# Altium PCB PROC091F.PcbDoc (part 2 of 8)
Units mil, origin at the board's own origin, x right, y up, seen from the top; angles counter-clockwise.
Board outline 3590.95 x 906.17 mil, 8 copper layers (Top Layer, GND1, Sig1, PWR1, PWR2, Sig2, GND2, Bottom Layer), stack 63.146 mil thick; 420 components, 316 nets, 1432 pads, 774 vias.
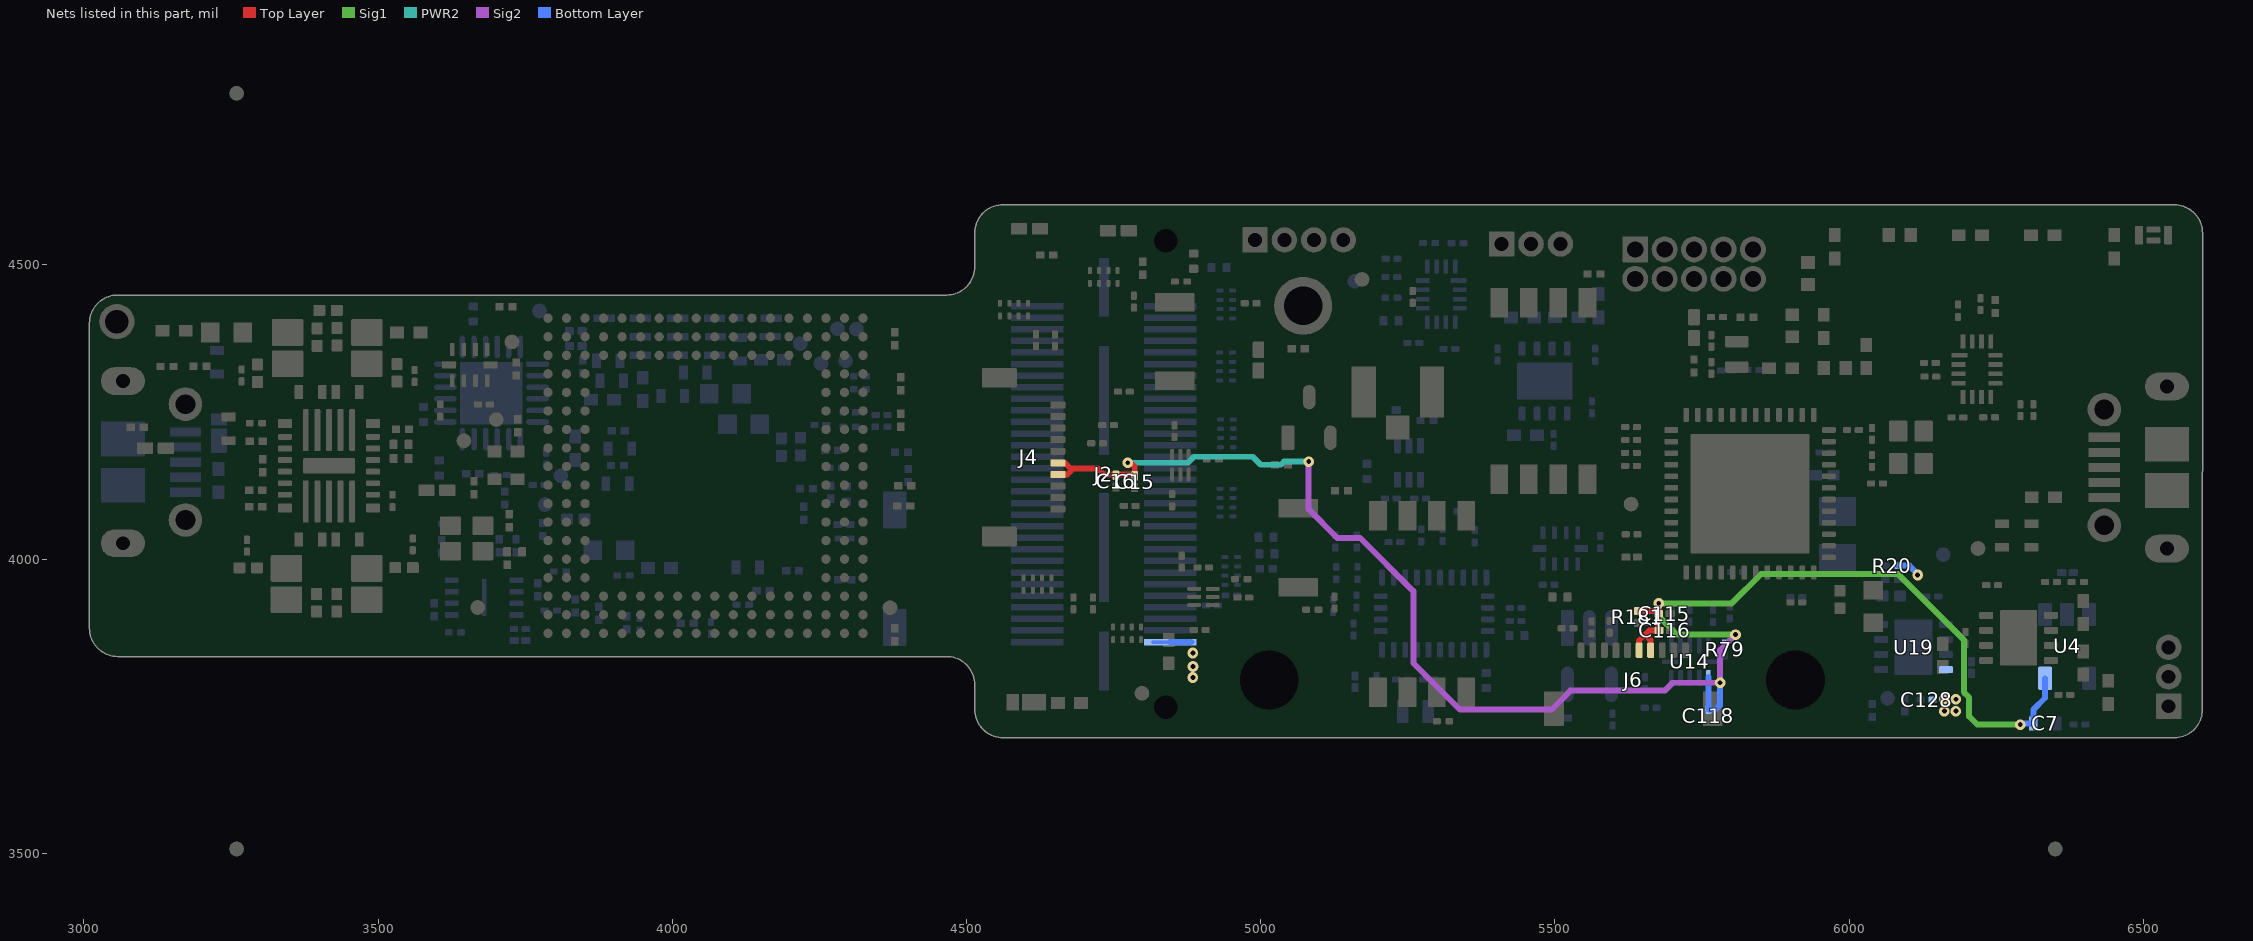
[diagram p8: the nets of this part, all layers, seen from the top]

## Components (designator, comment, footprint, x,y, rotation, side; value= is the part's Value field where it differs from the comment) (continued)
RA9 "EXB-18VR000X" FP-EXB-18VR000X_0502-MFG 4949.85,3979.76 r90 bottom locked
S1 "218-4LPST" SW_218-4LPST 5480.37,4285.46 r90 top
S2 "218-4LPST" SW_218-4LPST 5274.37,3923.46 r90 top
S3 "CHS-01TA" FP-CHS-01TA_SMT_SW_5MM4_2MM5-MFG 4378.13,3983.7 r270 bottom
SW2 "B3U-1000P" SW_B3U-1000P 4854.16,4369.94 r270 top
SW3 "B3U-1000P" SW_B3U-1000P 5063.87,4019.39 r90 top
TP2 "TESTPOINT" TP_25MIL-SMT 3810.59,4141.77 r90 bottom
TP3 "TESTPOINT" TP_25MIL-SMT 3784,4092.76 r90 bottom
TP4 "TESTPOINT" TP_25MIL-SMT 6159.89,4007.65 r180 bottom
TP5 "TESTPOINT" TP_25MIL-SMT 3669.3,3917.72 r90 top
TP6 "TESTPOINT" TP_25MIL-SMT 4313,4390.94 r0 bottom
TP7 "TESTPOINT" TP_25MIL-SMT 4280.69,4391.59 r270 bottom
TP8 "TESTPOINT" TP_25MIL-SMT 4252.7,4332.6 r90 bottom
TP9 "TESTPOINT" TP_25MIL-SMT 4217.3,4366.19 r90 bottom
TP10 "TESTPOINT" TP_25MIL-SMT 6065.37,3763.46 r270 bottom
TP11 "TESTPOINT" TP_25MIL-SMT 4370,3917.37 r90 top
TP12 "TESTPOINT" TP_VIA_060RND040 3056.09,4403.54 r90 top
TP13 "TESTPOINT" TP_25MIL-SMT 4798.18,3771.83 r270 top
TP14 "TESTPOINT" TP_25MIL-SMT 4294.6,4337.1 r180 bottom
TP15 "TESTPOINT" TP_25MIL-SMT 6219,4018 r90 top
TP16 "TESTPOINT" TP_25MIL-SMT 5629.37,4093.46 r180 top
TP17 "TESTPOINT" TP_25MIL-SMT 3701,4237 r270 top
TP18 "TESTPOINT" TP_25MIL-SMT 3727.56,4369.01 r90 top
TP19 "TESTPOINT" TP_25MIL-SMT 3645.95,4200.94 r90 top
TP20 "4953" FP-4953_HDR1-MFG 5072.16,4430.47 r180 bottom locked
TP26 "TESTPOINT" TP_25MIL-SMT 3774.42,4421.63 r0 bottom
TP27 "TESTPOINT" TP_25MIL-SMT 5172.19,4475.26 r270 top
TP46 "TESTPOINT" TP_25MIL-SMT 5159.8,4472.11 r180 bottom locked
U1 "LP87524JRNFRQ1" RNF0026C 3416.61,4158.52 r180 top
U2 "XI6843ARQGALP" ALP0180A 4056.48,4141.61 r90 top
U3 "CP2105-F01-GMR" FP-CP2105-F01-GMR_QFN24-EP-IPC_A 3692.64,4282.2 r180 bottom
U4 "TPS79330DBVR" DBV0005A_N 6370.37,3851.63 r270 bottom
U5 "TMP112AQDRLRQ1" DRL0006A 5251.98,4163.77 r270 bottom locked
U6 "CAT24C08TDI-GT3" FP-CAT24C08TDI-GT3_TSOT-23-5-IPC_A 5558.54,3835.01 r270 bottom
U7 "BNO085" FP-BNO085_LGA28-MFG 5294.88,3907.22 r270 bottom
U8 "CC2642R1FRGZR" RGZ0048A 5831.57,4111.11 r270 top
U9 "MX25R1635FZUIH0" USON-8L 3680.29,3934.68 r0 bottom
U10 "TCA6408ARSVR" RSV0016A 5306.8,4449.73 r180 bottom locked
U11 "SN74LVC1G3157DSFR" DSF0006A 4902.7,3935.72 r0 top locked
U12 "TCAN1042HGVDRBRQ1" DRB0008F#1 5482.58,4302.51 r90 bottom
U13 "TS3A5018RSVR" RSV0016A 6217.13,4322.76 r0 top
U14 "TXB0104QRUTRQ1" RUT0012A 5729.23,3825.36 r90 bottom
U15 "TS5A23157RSER" RSE0010A 5509.21,4018.34 r270 bottom
U16 "SN74LVC1G11DSFR" DSF0006A-MFG 4863.37,4159.46 r90 top
U17 "TCAN1042HGVDRBRQ1" DRB0008F#2 6287.97,3866 r0 top
U18 "TS5A23157RSER" RSE0010A 3655.79,4329.59 r270 top
U19 "TPS2115ADRBR" DRB0008B 6109.37,3850.46 r0 bottom
Y1 "CX2016DB40000D0FLJCC" FP-CX2016DB40000D0FLJCC_SMT_2MM0_1MM6-MFG 3650.54,4035.03 r0 top
Y2 "CX2016DB48000C0WPLA2" FP-CX2016DB48000C0WPLA2_SMD4-MFG 6104.9,4189.85 r270 top
Y3 "ABS05W-32.768KHZ-D-2-T" FP-ABS05W-32.768KHZ-D-2-T_XTAL_SMT_1MM6_1MM0-MFG 5808.9,4347.93 r270 top
Y4 "ABS05W-32.768KHZ-D-2-T" FP-ABS05W-32.768KHZ-D-2-T_XTAL_SMT_1MM6_1MM0-MFG 5262.82,3740.88 r0 bottom locked
ZZ1 "This Assembly Note is for PCB labels only" AssemblyNoteLabel 2349.62,2814.36 r0 top
ZZ2 "These assemblies are ESD sensitive, ESD precautions shall be observed." AssemblyNote 2346.49,2738.89 r0 top
ZZ3 "These assemblies must be clean and free from flux and all contaminants. Use of no clean flux is not acceptable." AssemblyNote 2346.43,2653.5 r0 top
ZZ4 "These assemblies must comply with workmanship standards IPC-A-610 Class 2, unless otherwise specified." AssemblyNote 2343.34,2567.2 r0 top
ZZ5.1 "Cut the thermal pad(Part Number#GPVOUS-0.125-AC-0816) for the shape and size of the inner surface of the heatsink(Part Number#MCH054) and paste it on the inner surface of the heatsink;" AssemblyNote 2340.76,2492.7 r0 top
ZZ5.2 "Bring the heatsink onto the PCB bottom side (Opposite side of AOP device). Match the teeth in the heatsink with break-away area in the PCB and press the heatsink onto the PCB slightly so as thermal pad is spread all over the area" AssemblyNote 2343.41,2409 r0 top

## Footprints (in the part's own frame and the unit in brackets; to place one, negate y for a bottom-side part, rotate by r counter-clockwise, add the part's x,y. Pads: shape width x height; smd on the part's side, far side on the other; paste and mask are expansions set on the pad)
0201_033L [mm] "0201"
  rect 0.36x0.32 smd mask+0.048: 1(-0.28,0) 2(0.28,0)
  body extent -0.31,-0.16 0.31,0.16, height 0.33
0201L [mm] "Data from Kemet datasheet CC101_COM dated 7/28/11"
  rect 0.36x0.32 smd mask+0.048: 1(-0.28,0) 2(0.28,0)
  body extent -0.31,-0.16 0.31,0.16, height 0.26
0402_070 [mil] "SMD, 2-Leads, Body 1.2x0.7mm, Height 0.7mm"
  rect 15x24 smd: 1(-20,0) 2(20,0)
  body extent -24,-14 24,14, height 28
0402L [mm] "0402 from SM-752 data"
  rect 0.6x0.5 smd: 1(-0.5,0) 2(0.5,0)
  body extent -0.55,-0.3 0.55,0.3, height 0.6
0603L [mm] "0603 from SM-752 data"
  rect 0.8x0.85 smd: 1(-0.7,0) 2(0.7,0)
  silkscreen extent -0.07,-0.33 0.07,0.33, body extent -0.87,-0.47 0.87,0.47, height 1
0805_HV [mil] "0805 with 30mil clearance between pads"
  rect 50x63 smd: 1(-40,0) 2(40,0)
  silkscreen extent -74,-40 74,40, body extent -43,-29 43,29, height 57
ALP0180A [mm] "BGA-180"
  round 0.4 smd: A1(-6.8,6.8) A2(-6,6.8) A3(-5.2,6.8) A4(-4.4,6.8) A5(-3.6,6.8) A6(-2.8,6.8) A7(-2,6.8) A8(-1.2,6.8) A9(-0.4,6.8) A10(0.4,6.8) A11(1.2,6.8) A12(2,6.8) A13(2.8,6.8) A14(3.6,6.8) A15(4.4,6.8) A16(5.2,6.8) A17(6,6.8) A18(6.8,6.8) B1(-6.8,6) B2(-6,6) B3(-5.2,6) B4(-4.4,6) B5(-3.6,6) B6(-2.8,6) B7(-2,6) B8(-1.2,6) B9(-0.4,6) B10(0.4,6) B11(1.2,6) B12(2,6) B13(2.8,6) B14(3.6,6) B15(4.4,6) B16(5.2,6) B17(6,6) B18(6.8,6) C1(-6.8,5.2) C2(-6,5.2) C3(-5.2,5.2) C4(-4.4,5.2) C5(-3.6,5.2) C6(-2.8,5.2) C7(-2,5.2) C8(-1.2,5.2) C9(-0.4,5.2) C10(0.4,5.2) C11(1.2,5.2) C12(2,5.2) C13(2.8,5.2) C14(3.6,5.2) C15(4.4,5.2) C16(5.2,5.2) C17(6,5.2) C18(6.8,5.2) D1(-6.8,4.4) D2(-6,4.4) D3(-5.2,4.4) D16(5.2,4.4) D17(6,4.4) D18(6.8,4.4) E1(-6.8,3.6) E2(-6,3.6) E3(-5.2,3.6) E16(5.2,3.6) E17(6,3.6) E18(6.8,3.6) F1(-6.8,2.8) F2(-6,2.8) F3(-5.2,2.8) F16(5.2,2.8) F17(6,2.8) F18(6.8,2.8) G1(-6.8,2) G2(-6,2) G3(-5.2,2) G16(5.2,2) G17(6,2) G18(6.8,2) H1(-6.8,1.2) H2(-6,1.2) H3(-5.2,1.2) H16(5.2,1.2) H17(6,1.2) H18(6.8,1.2) J1(-6.8,0.4) J2(-6,0.4) J3(-5.2,0.4) J16(5.2,0.4) J17(6,0.4) J18(6.8,0.4) K1(-6.8,-0.4) K2(-6,-0.4) K3(-5.2,-0.4) K16(5.2,-0.4) K17(6,-0.4) K18(6.8,-0.4) L1(-6.8,-1.2) L2(-6,-1.2) L3(-5.2,-1.2) L16(5.2,-1.2) L17(6,-1.2) L18(6.8,-1.2) M1(-6.8,-2) M2(-6,-2) M3(-5.2,-2) M16(5.2,-2) M17(6,-2) M18(6.8,-2) N1(-6.8,-2.8) N2(-6,-2.8) N3(-5.2,-2.8) N16(5.2,-2.8) N17(6,-2.8) N18(6.8,-2.8) P1(-6.8,-3.6) P2(-6,-3.6) P3(-5.2,-3.6) P16(5.2,-3.6) P17(6,-3.6) P18(6.8,-3.6) R1(-6.8,-4.4) R2(-6,-4.4) R3(-5.2,-4.4) R16(5.2,-4.4) R17(6,-4.4) R18(6.8,-4.4) T1(-6.8,-5.2) T2(-6,-5.2) T3(-5.2,-5.2) T4(-4.4,-5.2) T5(-3.6,-5.2) T6(-2.8,-5.2) T7(-2,-5.2) T8(-1.2,-5.2) T9(-0.4,-5.2) T10(0.4,-5.2) T11(1.2,-5.2) T12(2,-5.2) T13(2.8,-5.2) T14(3.6,-5.2) T15(4.4,-5.2) T16(5.2,-5.2) T17(6,-5.2) T18(6.8,-5.2) U1(-6.8,-6) U2(-6,-6) U3(-5.2,-6) U4(-4.4,-6) U5(-3.6,-6) U6(-2.8,-6) U7(-2,-6) U8(-1.2,-6) U9(-0.4,-6) U10(0.4,-6) U11(1.2,-6) U12(2,-6) U13(2.8,-6) U14(3.6,-6) U15(4.4,-6) U16(5.2,-6) U17(6,-6) U18(6.8,-6) V1(-6.8,-6.8) V2(-6,-6.8) V3(-5.2,-6.8) V4(-4.4,-6.8) V5(-3.6,-6.8) V6(-2.8,-6.8) V7(-2,-6.8) V8(-1.2,-6.8) V9(-0.4,-6.8) V10(0.4,-6.8) V11(1.2,-6.8) V12(2,-6.8) V13(2.8,-6.8) V14(3.6,-6.8) V15(4.4,-6.8) V16(5.2,-6.8) V17(6,-6.8) V18(6.8,-6.8)
  silkscreen extent -7.5,-7.5 7.5,7.5, body extent -7.5,-7.5 7.5,7.5, height 0.86
APHHS1005_Green [mm] "SMD, 2-Leads, Body 1x0.5mm"
  rrect20% 0.7x0.5 smd: 1(-0.45,0) 2(0.45,0)
  silkscreen extent -0.8,-0.65 1.2,0.65, body extent -0.5,-0.25 0.5,0.25, height 0.5
AssemblyNote [mil] "Assembly Note"
AssemblyNoteLabel [mil] "Assembly Note for PCB Labels"
BRAKE_WAY_HOLES1X2 [mil]
  round 27 hole 32 unplated mask+5.5: ""(-50,30.26) ""(0,30.26) ""(50,30.26)
CONN_105017-0001 [mm] "Molex Micro USB-B"
  rect 0.4x1.35 smd: 1(-1.3,1.35) 2(-0.65,1.35) 3(0,1.35) 4(0.65,1.35) 5(1.3,1.35)
  oval 1.2x1.9 hole 0.6 slot 1.3 at 90 deg: 6(-3.5,-1.35) 9(3.5,-1.35)
  rect 1.5x1.9 smd: 7(-1,-1.35) 8(1,-1.35)
  round 1.45 hole 0.85: 10(2.5,1.35) 11(-2.5,1.35)
  Top Layer region: -3.5,-0.4 -2.3,-0.4 -2.3,-2.3 -3.5,-2.3
  Top Layer region: 3.5,-2.3 2.3,-2.3 2.3,-0.4 3.5,-0.4
  silkscreen extent -4.1,-0.2 4.1,1.4, body extent -4.1,-3.93 4.1,1.5, height 2.72
CONN_UFL-R-SMT-1 [mm] "Hirose recommended land pattern http://www.hirose.co.jp/cataloge_hp/e32119372.pdf 2009.2"
  rect 1.05x1 smd paste-0.1 mask-0.1: 1(-1.525,0)
  rect 2x0.9 on Top Paste: 2(0,1.5) 3(0,-1.5)
  rect 2x0.9 on Top Solder: 2(0,1.5) 3(0,-1.5)
  rect 2.2x1.05 smd paste-2 mask-2: 2(0,1.475) 3(0,-1.475)
  Top Layer keep-out region: -0.8,-0.702 1.1,-0.702 1.1,0.698 -0.8,0.698
  silkscreen extent -1.7,-1.7 1.7,1.7, body extent -1.55,-1.5 1.55,1.5, height 1.27
DBV0005A_N [mm] "SOT23, 5-Leads, Body 2.9x1.6mm, Pitch 0.95mm, Lead Span 2.8mm, IPC Medium Density"
  rrect17% 1x0.6 smd: 1(-1.375,0.95) 2(-1.375,0) 3(-1.375,-0.95) 4(1.375,-0.95) 5(1.375,0.95)
  silkscreen extent -0.25,-1.55 0.25,1.55, body extent -1.42,-1.46 1.42,1.46, height 1.09
DRB0008B [mm] "SON, 8-Leads, Body 3x3mm, Pitch 0.65mm, Thermal Pad 2.4x1.65mm, TI Recommended"
  rrect33% 0.6x0.3 smd: 1(-1.4,0.975) 2(-1.4,0.325) 3(-1.4,-0.325) 4(-1.4,-0.975) 5(1.4,-0.975) 6(1.4,-0.325) 7(1.4,0.325) 8(1.4,0.975)
  rrect9% 1.47x1.06 on Bottom Paste: 9(0,-0.63) 9(0,0.63)
  rrect6% 1.65x2.4 smd paste-1.2: 9(0,0)
  silkscreen extent -1.73,-1.73 1.73,1.73, body extent -1.5,-1.5 1.5,1.5, height 0.96
DRB0008F#1 [mm] "SON, 8-Leads, Body 3x3mm, Pitch 0.65mm, Thermal Pad 2.4x1.6mm, TI Recommended"
  rrect33% 0.6x0.3 smd: 1(-1.4,0.975) 2(-1.4,0.325) 3(-1.4,-0.325) 4(-1.4,-0.975) 5(1.4,-0.975) 6(1.4,-0.325) 7(1.4,0.325) 8(1.4,0.975)
  rrect9% 1.47x1.07 on Bottom Paste: 9(0,-0.635) 9(0,0.635)
  rrect6% 1.6x2.4 smd paste-1.2: 9(0,0)
  silkscreen extent -1.73,-1.73 1.73,1.73, body extent -1.5,-1.5 1.5,1.5, height 0.77
DRB0008F#2 [mm] "SON, 8-Leads, Body 3x3mm, Pitch 0.65mm, Thermal Pad 2.4x1.6mm, TI Recommended"
  rrect33% 0.6x0.3 smd: 1(-1.4,0.975) 2(-1.4,0.325) 3(-1.4,-0.325) 4(-1.4,-0.975) 5(1.4,-0.975) 6(1.4,-0.325) 7(1.4,0.325) 8(1.4,0.975)
  rrect9% 1.47x1.07 on Top Paste: 9(0,-0.635) 9(0,0.635)
  rrect6% 1.6x2.4 smd paste-1.2: 9(0,0)
  silkscreen extent -1.73,-1.73 1.73,1.73, body extent -1.5,-1.5 1.5,1.5, height 0.77
DRL0006A [mm] "SOTFL, 6-Flat Leads, Body 1.2x1.6x0.6mm, Pitch 0.5mm, TI recommended"
  rrect33% 0.67x0.3 smd: 1(-0.74,0.5) 2(-0.74,0) 3(-0.74,-0.5) 4(0.74,-0.5) 5(0.74,0) 6(0.74,0.5)
  silkscreen extent -0.9,-0.95 0.5,0.95, body extent -0.8,-0.8 0.8,0.8, height 0.61
DSF0006A [mm] "TI recommended land pattern"
  rrect59% 0.6x0.17 smd mask+0.045: 1(-0.4,0.35) 2(-0.4,0) 3(-0.4,-0.35) 4(0.4,-0.35) 5(0.4,0) 6(0.4,0.35)
  silkscreen extent -0.6,-0.63 0.6,0.63, body extent -0.5,-0.5 0.5,0.5, height 0.48
DSF0006A-MFG [mm]
  rrect59% 0.6x0.17 smd paste+0 mask+0: 1(-0.4,0.35) 2(-0.4,0) 3(-0.4,-0.35) 4(0.4,-0.35) 5(0.4,0) 6(0.4,0.35)
  silkscreen extent -1.14,-0.85 0.53,1.02, body extent -0.8,-0.63 0.8,0.63, height 0.25
DSN2_0603 [mm] "SMD, 2-Leads, Body 1.6x0.8mm"
  rect 0.52x0.7 smd: 1(-0.64,0)
  rect 1.05x0.7 smd: 2(0.275,0)
  silkscreen extent -1.4,-0.75 0.8,0.65, body extent -0.8,-0.4 0.8,0.4, height 0.31
FIDUCIAL6.4-20 [mil]
  round 25 smd mask+26.87: 1(0,0)
FP-250R05L120JV4T_0201-IPC_C [mm]
  rrect38% 0.363x0.263 smd paste+0 mask+0: 1(-0.25,0) 2(0.25,0)
  body extent -0.53,-0.27 0.53,0.26, height 0.25
FP-4953_HDR1-MFG [mm]
  round 2.5 hole 1.65 paste-1000 mask+0: 1(0,0)
  body extent -1.24,-0.25 1.24,0.25, height 9.16
FP-51441-1093_CONN_SMD_FFC-0 [mm]
  rrect33% 0.3x0.65 smd paste+0 mask+0: 1(-2.25,1.775) 2(-1.75,1.775) 3(-1.25,1.775) 4(-0.75,1.775) 5(-0.25,1.775) 6(0.25,1.775) 7(0.75,1.775) 8(1.25,1.775) 9(1.75,1.775) 10(2.25,1.775)
  rrect12% 0.85x1.5 smd paste+0 mask+0: 11(-3.425,-0.75) 12(3.425,-0.75)
  body extent -3.95,-1.9 3.95,2.2, height 0.25
FP-ABS05W-32.768KHZ-D-2-T_XTAL_SMT_1MM6_1MM0-MFG [mm]
  rrect20% 0.5x1 smd paste+0 mask+0: 1(-0.55,0) 2(0.55,0)
  body extent -0.95,-0.65 0.95,0.65, height 0.25
FP-AC0201FR-0720RL_0201-IPC_C [mil]
  rrect38% 13.94x10.34 smd paste+0 mask+0: 1(-10.01,0) 2(10.01,0)
  body extent -12,-6 12,6, height 10
FP-ANT016008LCS2442MA2_SMT_ANT-0 [mm]
  rrect29% 0.35x0.8 smd paste+0 mask+0.038: 1(-0.625,0) 4(0.625,0)
  rrect38% 0.6x0.26 smd paste+0 mask+0.038: 2-3(0,-0.235) 5-6(0,0.235)
  body extent -0.95,-0.55 0.95,0.55, height 0.25
FP-BNO085_LGA28-MFG [mm]
  rrect40% 0.675x0.25 smd paste+0 mask+0: 1(1.562,2.25) 6(-1.562,2.25) 7(-1.562,1.75) 8(-1.562,1.25) 9(-1.562,0.75) 10(-1.562,0.25) 11(-1.562,-0.25) 12(-1.562,-0.75) 13(-1.562,-1.25) 14(-1.562,-1.75) 15(-1.562,-2.25) 20(1.562,-2.25) 21(1.562,-1.75) 22(1.562,-1.25) 23(1.562,-0.75) 24(1.562,-0.25) 25(1.562,0.25) 26(1.562,0.75) 27(1.562,1.25) 28(1.562,1.75)
  rrect40% 0.25x0.575 smd paste+0 mask+0: 2(0.75,2.312) 3(0.25,2.312) 4(-0.25,2.312) 5(-0.75,2.312) 16(-0.75,-2.312) 17(-0.25,-2.312) 18(0.25,-2.312) 19(0.75,-2.312)
  body extent -1.9,-2.6 1.9,2.6, height 1.18
FP-BSS123-7-F_SOT23-IPC_C [mm]
  rrect18% 1.059x0.547 smd paste+0 mask+0: 1(-0.877,0.915)
  rrect100% 1.059x0.547 smd paste+0 mask+0: 2(-0.877,-0.915) 3(0.877,0)
  body extent -1.51,-1.55 1.51,1.55, height 0.25
FP-CAT24C08TDI-GT3_TSOT-23-5-IPC_A [mm]
  rrect18% 1.54x0.566 smd paste+0 mask+0: 1(-1.216,0.95)
  rrect100% 1.54x0.566 smd paste+0 mask+0: 2(-1.216,0) 3(-1.216,-0.95) 4(1.216,-0.95) 5(1.216,0.95)
  body extent -1.4,-1.45 1.4,1.45, height 1
FP-CHS-01TA_SMT_SW_5MM4_2MM5-MFG [mm]
  rrect10% 1.6x1 smd paste+0 mask+0: 1(-2.54,0) 2(2.54,0)
  body extent -2.8,-1.25 2.8,1.25, height 2.5
FP-CL03A103KA3NNNC_0201-IPC_C [mil]
  rrect38% 13.94x10.34 smd paste+0 mask+0: 1(-10.01,0) 2(10.01,0)
  body extent -12,-6 12,6, height 15
FP-CL03A105MO3NRNH_0201-IPC_C [mil]
  rrect33% 15.83x11.94 smd paste+0 mask+0: 1(-9.87,0) 2(9.87,0)
  body extent -12,-6 12,6, height 15
FP-CL05A226MQ5N6J8_0402-IPC_C [mil]
  rrect21% 20.29x18.6 smd paste+0 mask+0: 1(-14.9,0) 2(14.9,0)
  body extent -29,-15 29,15, height 10
FP-CP2105-F01-GMR_QFN24-EP-IPC_A [mm]
  rrect42% 0.979x0.239 smd paste+0 mask+0: 1(-1.99,1.25)
  rrect100% 0.979x0.239 smd paste+0 mask+0: 2(-1.99,0.75) 3(-1.99,0.25) 4(-1.99,-0.25) 5(-1.99,-0.75) 6(-1.99,-1.25) 13(1.99,-1.25) 14(1.99,-0.75) 15(1.99,-0.25) 16(1.99,0.25) 17(1.99,0.75) 18(1.99,1.25)
  rrect100% 0.239x0.979 smd paste+0 mask+0: 7(-1.25,-1.99) 8(-0.75,-1.99) 9(-0.25,-1.99) 10(0.25,-1.99) 11(0.75,-1.99) 12(1.25,-1.99) 19(1.25,1.99) 20(0.75,1.99) 21(0.25,1.99) 22(-0.25,1.99) 23(-0.75,1.99) 24(-1.25,1.99)
  rrect4% 2.7x2.7 smd paste-1000 mask+0: 25(0,0)
  body extent -2,-2 2,2, height 0.8
FP-CRCW0402200RFKEDHP_0402-IPC_C [mil]
  rrect21% 20.29x18.6 smd paste+0 mask+0: 1(-14.9,0) 2(14.9,0)
  body extent -20,-10 20,10, height 16
FP-CX2016DB40000D0FLJCC_SMT_2MM0_1MM6-MFG [mm]
  rrect13% 0.9x0.8 smd paste+0 mask+0: 1(-0.7,-0.55) 2(0.7,-0.55) 3(0.7,0.55) 4(-0.7,0.55)
  body extent -1.25,-1.05 1.25,1.05, height 0.25
FP-CX2016DB48000C0WPLA2_SMD4-MFG [mm]
  rrect13% 0.9x0.8 smd paste+0 mask+0: 1(-0.7,-0.55) 2(0.7,-0.55) 3(0.7,0.55) 4(-0.7,0.55)
  silkscreen extent -1.85,-1.35 1.05,1.35, body extent -1.25,-1.05 1.25,1.05, height 0.25
FP-ERJ-1GNF4701C_0201-IPC_C [mil]
  rrect38% 13.94x10.34 smd paste+0 mask+0: 1(-10.01,0) 2(10.01,0)
  body extent -12,-6 12,6, height 10
FP-EXB-18VR000X_0502-MFG [mm]
  rrect57% 0.175x0.3 smd paste+0 mask+0: 1(-0.6,-0.275) 2(-0.2,-0.275) 3(0.2,-0.275) 4(0.6,-0.275) 5(0.6,0.275) 6(0.2,0.275) 7(-0.2,0.275) 8(-0.6,0.275)
  body extent -0.85,-0.53 0.85,0.53, height 0.25
"FP-GRM033R6YA104KE14D_0201 (0603 Metric)-IPC_C" [mil]
  rrect38% 13.94x10.34 smd paste+0 mask+0: 1(-10.01,0) 2(10.01,0)
  body extent -12,-6 12,6, height 13
"FP-GRM0335C1H8R0BA01D_0201 (0603 metric)-IPC_C" [mil]
  rrect38% 13.94x10.34 smd paste+0 mask+0: 1(-10.01,0) 2(10.01,0)
  body extent -21,-10 21,10, height 10
FP-GRPB052MWCN-RC_HDR10-MFG [mm]
  rrect9% 1.12x1.12 hole 0.7 paste-1000 mask+0: 1(-2.54,1.15)
  round 1.12 hole 0.7 paste-1000 mask+0: 2(-2.54,2.42) 3(-1.27,1.15) 4(-1.27,2.42) 5(0,1.15) 6(0,2.42) 7(1.27,1.15) 8(1.27,2.42) 9(2.54,1.15) 10(2.54,2.42)
  silkscreen extent -3.77,-0.7 3.42,1.17, body extent -3.17,-3.5 3.17,2.62, height 3.4
FP-M50-3930342_HDR3-MFG [mm]
  rrect9% 1.1x1.1 hole 0.6 paste-1000 mask+0: 1(-1.27,1)
  round 1.1 hole 0.6 paste-1000 mask+0: 2(0,1) 3(1.27,1)
  silkscreen extent -2.15,-0.6 2.15,2.09, body extent -1.91,-4.5 1.91,1.2, height 2.3
FP-M50-3930442_HDR4-RECOMMENDED_LAND_PATTERN [mm]
  rrect9% 1.1x1.1 hole 0.6 paste-1000 mask+0: 1(-1.905,1)
  round 1.1 hole 0.6 paste-1000 mask+0: 2(-0.635,1) 3(0.635,1) 4(1.905,1)
  body extent -2.54,-4.5 2.54,1.2, height 2.3
"FP-MCKK2012TR47M_0805 (2012 Metric)-IPC_C" [mil]
  rrect9% 45.45x53.39 smd paste+0 mask+0: 1(-26.61,0) 2(26.61,0)
  body extent -39,-25 39,25, height 39
"FP-RC0201JR-070RL_0201 (0603 Metric)-IPC_C" [mil]
  rrect38% 13.94x10.34 smd paste+0 mask+0: 1(-10.01,0) 2(10.01,0)
  body extent -12,-6 12,6, height 10
"FP-RC0201JR-070RL_0201 (0603 METRIC)-IPC_C" [mil]
  rrect38% 13.94x10.34 smd paste+0 mask+0: 1(-10.01,0) 2(10.01,0)
  body extent -12,-6 12,6, height 10
"FP-RC0201JR-070RL_0201 (0603 Metric)-MFG" [mm]
  rrect29% 0.35x0.4 smd paste+0 mask+0: 1(-0.325,0) 2(0.325,0)
  body extent -0.3,-0.15 0.3,0.15, height 0.26
"FP-RC0402FR-073R83L_0402 (1005 Metric)-IPC_C" [mil]
  rrect21% 20.29x18.6 smd paste+0 mask+0: 1(-14.9,0) 2(14.9,0)
  body extent -20,-10 20,10, height 16
FP-RR0306P-103-D_0201-IPC_C [mil]
  rrect37% 13.31x10.73 smd paste+0 mask+0: 1(-10.52,0) 2(10.52,0)
  body extent -12,-6 12,6, height 10
"FP-TMK063CG391JT-F_0201 (0603 Metric)-IPC_C" [mil]
  rrect38% 13.94x10.34 smd paste+0 mask+0: 1(-10.01,0) 2(10.01,0)
  body extent -12,-6 12,6, height 13
IND_LQG15H [mm] "MuRata"
  rect 0.55x0.6 smd: 1(-0.475,0) 2(0.475,0)
  silkscreen extent -1.3,-0.3 -0.95,0.3, body extent -0.52,-0.27 0.52,0.27, height 0.55
MHNP_2-5 [mil]
  round 95 hole 100 unplated mask+5.5: ""(0,0)
  Keep-Out Layer circle w1: c0,0 r100
MHNP_M2_PANHEAD_PHILLIPS [mil]
  round 83 hole 88 unplated mask+5.5: ""(0,0)
  Keep-Out Layer circle w1: c0,0 r88
RGZ0048A [mm] "VQFN-48"
  rrect42% 0.6x0.24 smd: 1(-3.4,2.75) 2(-3.4,2.25) 3(-3.4,1.75) 4(-3.4,1.25) 5(-3.4,0.75) 6(-3.4,0.25) 7(-3.4,-0.25) 8(-3.4,-0.75) 9(-3.4,-1.25) 10(-3.4,-1.75) 11(-3.4,-2.25) 12(-3.4,-2.75) 25(3.4,-2.75) 26(3.4,-2.25) 27(3.4,-1.75) 28(3.4,-1.25) 29(3.4,-0.75) 30(3.4,-0.25) 31(3.4,0.25) 32(3.4,0.75) 33(3.4,1.25) 34(3.4,1.75) 35(3.4,2.25) 36(3.4,2.75)
  rrect42% 0.24x0.6 smd: 13(-2.75,-3.4) 14(-2.25,-3.4) 15(-1.75,-3.4) 16(-1.25,-3.4) 17(-0.75,-3.4) 18(-0.25,-3.4) 19(0.25,-3.4) 20(0.75,-3.4) 21(1.25,-3.4) 22(1.75,-3.4) 23(2.25,-3.4) 24(2.75,-3.4) 37(2.75,3.4) 38(2.25,3.4) 39(1.75,3.4) 40(1.25,3.4) 41(0.75,3.4) 42(0.25,3.4) 43(-0.25,3.4) 44(-0.75,3.4) 45(-1.25,3.4) 46(-1.75,3.4) 47(-2.25,3.4) 48(-2.75,3.4)
  rrect2% 5.15x5.15 smd paste-2.6: 49(0,0)
  body extent -3.5,-3.5 3.5,3.5, height 1
RNF0026C [mm] "QFN, 26-Leads, Body 4x4.5mm, Pitch 0.5mm"
  rrect25% 0.6x0.4 smd paste-0.3: 1(-1.9,1.825) 8(-1.9,-1.825) 14(1.9,-1.825) 21(1.9,1.825)
  rrect40% 0.6x0.25 smd paste+0: 2(-1.9,1.25) 3(-1.9,0.75) 4(-1.9,0.25) 5(-1.9,-0.25) 6(-1.9,-0.75) 7(-1.9,-1.25) 15(1.9,-1.25) 16(1.9,-0.75) 17(1.9,-0.25) 18(1.9,0.25) 19(1.9,0.75) 20(1.9,1.25)
  rrect40% 0.25x1.82 smd paste-1: 9(-1,-1.54) 10(-0.5,-1.54) 11(0,-1.54) 12(0.5,-1.54) 13(1,-1.54) 22(1,1.54) 23(0.5,1.54) 24(0,1.54) 25(-0.5,1.54) 26(-1,1.54)
  rrect15% 2.24x0.66 smd paste-1: 27(0,0)
  rrect33% 0.6x0.3 on Top Paste: ""(-1.9,1.775) ""(-1.9,-1.775) ""(1.9,1.775) ""(1.9,-1.775)
  rrect33% 0.3x0.825 on Top Paste: ""(-1.575,2.037) ""(-1.575,-2.037) ""(1.575,2.037) ""(1.575,-2.037)
  rrect40% 0.25x0.81 on Top Paste: ""(-1,1.035) ""(-1,2.045) ""(-1,-2.045) ""(-1,-1.035) ""(-0.5,2.045) ""(-0.5,1.035) ""(-0.5,-1.035) ""(-0.5,-2.045) ""(0,2.045) ""(0,1.035) ""(0,-1.035) ""(0,-2.045) ""(0.5,2.045) ""(0.5,1.035) ""(0.5,-1.035) ""(0.5,-2.045) ""(1,1.035) ""(1,2.045) ""(1,-2.045) ""(1,-1.035)
  rrect15% 0.98x0.66 on Top Paste: ""(-0.59,0) ""(0.59,0)
  Top Layer region: -1.775,-2.4 -1.775,-1.675 -1.771,-1.656 -1.76,-1.64 -1.744,-1.629 -1.725,-1.625 -1.725,-1.625 -1.475,-1.625 -1.456,-1.629 -1.44,-1.64 -1.429,-1.656 -1.425,-1.675 -1.425,-1.675 -1.425,-2.4 -1.429,-2.419 -1.44,-2.435 -1.456,-2.446 -1.475,-2.45 -1.475,-2.45 -1.725,-2.45 -1.744,-2.446 -1.76,-2.435 -1.771,-2.419 -1.775,-2.4
  Top Layer region: 1.425,-2.4 1.425,-1.675 1.429,-1.656 1.44,-1.64 1.456,-1.629 1.475,-1.625 1.475,-1.625 1.725,-1.625 1.744,-1.629 1.76,-1.64 1.771,-1.656 1.775,-1.675 1.775,-1.675 1.775,-2.4 1.771,-2.419 1.76,-2.435 1.744,-2.446 1.725,-2.45 1.725,-2.45 1.475,-2.45 1.456,-2.446 1.44,-2.435 1.429,-2.419 1.425,-2.4
  Top Layer region: 1.425,1.675 1.425,2.4 1.429,2.419 1.44,2.435 1.456,2.446 1.475,2.45 1.475,2.45 1.725,2.45 1.744,2.446 1.76,2.435 1.771,2.419 1.775,2.4 1.775,2.4 1.775,1.675 1.771,1.656 1.76,1.64 1.744,1.629 1.725,1.625 1.725,1.625 1.475,1.625 1.456,1.629 1.44,1.64 1.429,1.656 1.425,1.675
  Top Layer region: -1.775,1.675 -1.775,2.4 -1.771,2.419 -1.76,2.435 -1.744,2.446 -1.725,2.45 -1.725,2.45 -1.475,2.45 -1.456,2.446 -1.44,2.435 -1.429,2.419 -1.425,2.4 -1.425,2.4 -1.425,1.675 -1.429,1.656 -1.44,1.64 -1.456,1.629 -1.475,1.625 -1.475,1.625 -1.725,1.625 -1.744,1.629 -1.76,1.64 -1.771,1.656 -1.775,1.675
  silkscreen extent -2.45,-2.7 2.45,2.7, body extent -2,-2.25 2,2.25, height 0.9
RSE0010A [mm] "QFN, 10-Leads, Body 1.5x2mm, Pitch 0.5mm, TI Recommended"
  rect 0.55x0.2 smd: 1(-0.675,0.75) 2(-0.675,0.25) 3(-0.675,-0.25) 4(-0.675,-0.75) 6(0.675,-0.75) 7(0.675,-0.25) 8(0.675,0.25) 9(0.675,0.75)
  rect 0.3x0.6 smd: 5(0,-0.9) 10(0,0.9)
  silkscreen extent -1.07,-1.17 0.77,1.18, body extent -0.77,-1.02 0.78,1.03, height 0.61
RSV0016A [mm] "QFN, 16-Leads, Body 1.8x2.6mm, Pitch 0.4mm, TI Recommended"
  rect 0.7x0.2 smd: 1(-0.75,0.6)
  rect 0.6x0.2 smd: 2(-0.8,0.2) 3(-0.8,-0.2) 4(-0.8,-0.6) 9(0.8,-0.6) 10(0.8,-0.2) 11(0.8,0.2) 12(0.8,0.6)
  rect 0.2x0.6 smd: 5(-0.6,-1.2) 6(-0.2,-1.2) 7(0.2,-1.2) 8(0.6,-1.2) 13(0.6,1.2) 14(0.2,1.2) 15(-0.2,1.2) 16(-0.6,1.2)
  silkscreen extent -1.08,-1.33 1.08,1.45, body extent -0.92,-1.32 0.92,1.33, height 0.56
RUT0012A [mm] "QFN, 12-Leads, Body 1.7x2mm, Pitch 0.4mm, TI Recommended"
  rrect50% 0.7x0.2 smd: 1(-0.7,0.8) 2(-0.7,0.4) 3(-0.7,0) 4(-0.7,-0.4) 5(-0.7,-0.8) 7(0.7,-0.8) 8(0.7,-0.4) 9(0.7,0) 10(0.7,0.4) 11(0.7,0.8)
  rrect50% 0.2x0.7 smd: 6(0,-0.85) 12(0,0.85)
  silkscreen extent -0.9,-1.2 0.9,1.2, body extent -0.85,-1 0.85,1, height 0.55
Samtec_QSH-030-01-X-D-A [mm] "Receptacle, 0.5 mm, 30x2, TH"
  rect 2.27x0.279 smd: 1(-2.865,7.25) 2(2.865,7.25) 3(-2.865,6.75) 4(2.865,6.75) 5(-2.865,6.25) 6(2.865,6.25) 7(-2.865,5.75) 8(2.865,5.75) 9(-2.865,5.25) 10(2.865,5.25) 11(-2.865,4.75) 12(2.865,4.75) 13(-2.865,4.25) 14(2.865,4.25) 15(-2.865,3.75) 16(2.865,3.75) 17(-2.865,3.25) 18(2.865,3.25) 19(-2.865,2.75) 20(2.865,2.75) 21(-2.865,2.25) 22(2.865,2.25) 23(-2.865,1.75) 24(2.865,1.75) 25(-2.865,1.25) 26(2.865,1.25) 27(-2.865,0.75) 28(2.865,0.75) 29(-2.865,0.25) 30(2.865,0.25) 31(-2.865,-0.25) 32(2.865,-0.25) 33(-2.865,-0.75) 34(2.865,-0.75) 35(-2.865,-1.25) 36(2.865,-1.25) 37(-2.865,-1.75) 38(2.865,-1.75) 39(-2.865,-2.25) 40(2.865,-2.25) 41(-2.865,-2.75) 42(2.865,-2.75) 43(-2.865,-3.25) 44(2.865,-3.25) 45(-2.865,-3.75) 46(2.865,-3.75) 47(-2.865,-4.25) 48(2.865,-4.25) 49(-2.865,-4.75) 50(2.865,-4.75) 51(-2.865,-5.25) 52(2.865,-5.25) 53(-2.865,-5.75) 54(2.865,-5.75) 55(-2.865,-6.25) 56(2.865,-6.25) 57(-2.865,-6.75) 58(2.865,-6.75) 59(-2.865,-7.25) 60(2.865,-7.25)
  round 0 hole 1.02 unplated: MH1(2.67,10.065) MH2(2.67,-10.065)
  rect 0.43x2.54 smd: MP1(0,8.065) MP4(0,-8.065)
  rect 0.43x4.7 smd: MP2(0,3.175) MP3(0,-3.175)
  silkscreen extent -3.9,-10.66 3.62,10.66, body extent -3.75,-10.64 3.75,10.67, height 3.25
SW_218-4LPST [mil] "CTS Components"
  rect 50x30 smd: 1(-150,75) 2(-150,25) 3(-150,-25) 4(-150,-75) 5(150,-75) 6(150,-25) 7(150,25) 8(150,75)
  silkscreen extent -114,-123 114,123, body extent -166,-123 166,123, height 104
SW_B3U-1000P [mm] "OMRON"
  rect 0.8x1.7 smd: 1(-1.7,0) 2(1.7,0)
  silkscreen extent -1.5,-1.25 1.5,1.25, body extent -1.5,-1.25 1.5,1.25, height 1.75
TP_25MIL-SMT [mil]
  round 25 smd mask-2.5: 1(0,0)
TP_VIA_060RND040 [mil] "TP_VIA_060RND040"
  round 60 hole 40: 1(0,0)
USON-8L [mm] "SON, 8-Leads, Body 3x2mm, Pitch 0.5mm"
  rrect40% 0.6x0.25 smd: 1(-1.4,0.75) 2(-1.4,0.25) 3(-1.4,-0.25) 4(-1.4,-0.75) 5(1.4,-0.75) 6(1.4,-0.25) 7(1.4,0.25) 8(1.4,0.75)
  rrect50% 0.2x1.6 smd: 9(0,0)
  silkscreen extent -1.55,-1.17 0.65,1.17, body extent -1.55,-1.05 1.55,1.05, height 0.6

## Part data
A1: library part CMP-0087189-1, "RF ANT 2.4GHZ CHIP SOLDER SMD", Manufacturer="TDK Corporation", PackageReference=SMT_ANT, PartNumber=ANT016008LCS2442MA2, RoHS=TRUE, SizeZ_mm=0.4mm, Symbol Name=SYM-ANT016008LCS2442MA2
C1 C4 C7 C42 C50 C51 C52 C53 C55 C59 C62 C65 C70 C73 C78 C82 C122: library part CMP-0006339-4, "CAP, CERM, 10 uF, 10 V, +/- 20%, X5R, 0402", Cap_Case=0402, Manufacturer="Samsung Electro-Mechanics", TempCo=X5R, Tolerance_%=20%, Value1=Unknown, Value2=10V, ValueDisplayed=10uF, AEC Category=Q200, AEC Grade=N/A, AEC Qualified=N, Cap_F=10µF, ComponentLink1Description="Datasheet link", ComponentLink1URL=http://www.samsungsem.com/kr/support/product-search/mlcc/__icsFiles/afieldfile/2018/06/21/CL05A106MP5NUNC.pdf, CompType=Capacitor, MountType=SMT, PackageReference=0402, PartNumber=CL05A106MP5NUNC, Polarized=N, RoHS=Y, SizeArea_mm2=0.5, SizeAreaWB_mm2=3, SizeX_mm=1, SizeY_mm=0.5, SizeZ_mm=0.6, TaMax_C=85°C, TaMin_C=-55°C, Technology=Ceramic, U/M=EA, VDC_V=10V
C2 C3 C6 C9 C10 C12 C13 C25 C26 C27 C35 C36 C37 C40 C43 C72 C86 C91 C92 C101 C105 C107 C108 C109 C114 C117 C118 C119 C120 C123 C126 C127 C128 C130: library part CMP-0086440-1, "Cap Ceramic 0.1uF 35V X5R 10% Pad SMD 0201 85C T/R", Manufacturer="Murata Electronics North America", TempCo=15%, Tolerance_%=10%, AEC Qualified=No, Cap_F=100nF, ComponentLink1Description=Datasheet, ComponentLink1URL=https://search.murata.co.jp/Ceramy/image/img/A01X/G101/ENG/GRM033R6YA104KE14-01.pdf, PackageReference="0201 (0603 Metric)", PartNumber=GRM033R6YA104KE14D, RoHS=TRUE, SizeZ_mm=0.33mm, Symbol Name=SYM-GRM033R6YA104KE14D, VDC_V=35V
C5 C11 C15 C16 C24 C100 C115 C116 C129: library part CMP-0086446-1, "1µF ±20% 16V Ceramic Capacitor X5R 0201", Manufacturer="Samsung Electro-Mechanics", TempCo=15%, Tolerance_%=20%, AEC Qualified=No, Cap_F=1µF, ComponentLink1Description=Datasheet, ComponentLink1URL=http://www.samsungsem.com/global/front/downloadcms.do?path=%2F%2Fglobal%2F%2Fsupport%2F%2Fproduct-search%2F%2Fmlcc%2F%2F__icsFiles%2F%2Fafieldfile%2F%2F2018%2F%2F06%2F%2F21&fileName=CL03A105MO3NRNH.pdf, PackageReference=0201, PartNumber=CL03A105MO3NRNH, RoHS=TRUE, SizeZ_mm=0.39mm, Symbol Name=SYM-CL03A105MO3NRNH, VDC_V=16V
C8 C125: library part CMP-0086445-1, "CAP CER 10000PF 25V X5R 0201", Manufacturer="Samsung Electro-Mechanics America, Inc", TempCo=15%, Tolerance_%=10%, AEC Qualified=No, Cap_F=10nF, ComponentLink1Description=Datasheet, ComponentLink1URL=http://www.samsungsem.com/global/front/downloadcms.do?path=%2F%2Fglobal%2F%2Fsupport%2F%2Fproduct-search%2F%2Fmlcc%2F%2F__icsFiles%2F%2Fafieldfile%2F%2F2018%2F%2F06%2F%2F19&fileName=CL03A103KA3NNNC.pdf, PackageReference=0201, PartNumber=CL03A103KA3NNNC, RoHS=TRUE, SizeZ_mm=0.33mm, Symbol Name=SYM-CL03A103KA3NNNC, VDC_V=25V
C14 C71: library part CMP-0080076-1, "CAP, CERM, 4.7 pF, 50 V,+/- 3%, C0G/NP0, 0201", Cap_Case=0201, Manufacturer=MuRata, Supplier Part Number 1=490-11332-1-ND, TempCo=C0G/NP0, Tolerance_%=3%, Value2=50V, ValueDisplayed=4.7pF, AEC Category=Q200, AEC Grade=N/A, AEC Qualified=N, Cap_F=4.7pF, ComponentLink1Description="Datasheet link", ComponentLink1URL=https://search.murata.co.jp/Ceramy/image/img/A01X/G101/ENG/GRM0335C1H4R7BA01-01A.pdf, CompType=Capacitor, MountType=SMT, PackageReference=0201, PartNumber=GRM0335C1H4R7BA01D, Polarized=N, RoHS=Y, SizeArea_mm2=0.18, SizeAreaWB_mm2=2.08, SizeX_mm=0.6, SizeY_mm=0.3, SizeZ_mm=0.33, Supplier 1=Digi-Key, Supplier 2=Mouser, Supplier Part Number 2=81-GRM0335C1H4R7BA1D, TaMax_C=125°C, TaMin_C=-55°C, Technology=Ceramic, U/M=EA, VDC_V=50V
C17 C18: library part CMP-0086441-1, "Cap Ceramic 8pF 50V C0G 0.1pF SMD 0201 125°C Paper T/R", Manufacturer=Murata, TempCo=30ppm/°C, AEC Qualified=No, Cap_F=8pF, ComponentLink1Description=Datasheet, ComponentLink1URL=https://search.murata.co.jp/Ceramy/image/img/A01X/G101/ENG/GRM0335C1H8R0BA01-01A.pdf, PackageReference="0201 (0603 metric)", PartNumber=GRM0335C1H8R0BA01D, RoHS=TRUE, SizeZ_mm=0.33mm, Symbol Name=SYM-GRM0335C1H8R0BA01D, VDC_V=50V
C19 C20 C38 C39: library part CMP-0087190-1, "CAP CER 12PF 25V C0G/NP0 0201", Manufacturer="Johanson Technology Inc.", TempCo=30ppm/°C, Tolerance_%=5%, AEC Grade="Grade 1", AEC Qualified=Yes, Cap_F=12pF, ComponentLink1Description=Datasheet, ComponentLink1URL=https://www.johansontechnology.com/downloads/catalog/johanson-technology-multi-layer-high-q-capacitors.pdf, PackageReference=0201, PartNumber=250R05L120JV4T, RoHS=TRUE, SizeZ_mm=0.33mm, Symbol Name=SYM-250R05L120JV4T, VDC_V=25V
C21 C93: library part CMP-0006345-2, "CAP, CERM, 12 pF, 50 V, +/- 5%, C0G/NP0, 0402", Cap_Case=0402, Manufacturer="Samsung Electro-Mechanics", Supplier Part Number 1=1276-1178-1-ND, TempCo=C0G/NP0, Tolerance_%=5%, Value1=Unknown, Value2=50V, ValueDisplayed=12pF, AEC Category=Q200, AEC Grade=N/A, AEC Qualified=N, Cap_F=12pF, ComponentLink1Description="Datasheet link", ComponentLink1URL=http://www.samsungsem.com/servlet/FileDownload?type=spec&file=CL05C120JB5NNNC.pdf, CompType=Capacitor, LatestRevisionDate=2017-03-09, MountType=SMT, PackageReference=0402, PartNumber=CL05C120JB5NNNC, Polarized=N, Published=2008-06-19, Publisher="Texas Instruments", RoHS=Y, SizeArea_mm2=0.5, SizeAreaWB_mm2=3, SizeX_mm=1, SizeY_mm=0.5, SizeZ_mm=0.6, Supplier 1=Digi-Key, TaMax_C=125°C, TaMin_C=-55°C, Technology=Ceramic, U/M=EA, VDC_V=50V
C22 C23 C41: library part CMP-0085178-1, "CAP, CERM, 1 pF, 50 V,+/- 25%, C0G/NP0, AEC-Q200 Grade 1, 0402", Cap_Case=0402, Manufacturer=MuRata, TempCo=C0G/NP0, Tolerance_%=25%, Value2=50V, ValueDisplayed=1pF, AEC Category=Q200, AEC Grade=1, AEC Qualified=Y, Cap_F=1pF, ComponentLink1Description="Datasheet link", ComponentLink1URL=https://psearch.en.murata.com/capacitor/product/GCM1555C1H1R0CA16%23.html, CompType=Capacitor, MountType=SMT, PackageReference=0402, PartNumber=GCM1555C1H1R0CA16D, Polarized=N, RoHS=Y, SizeArea_mm2=0.5, SizeAreaWB_mm2=3, SizeX_mm=1, SizeY_mm=0.5, SizeZ_mm=0.6, TaMax_C=125°C, TaMin_C=-55°C, Technology=Ceramic, U/M=EA, VDC_V=50V
C28 C29 C44 C45 C46 C47 C48 C49 C54 C77: library part CMP-0089043-3, "CAP CER 22UF 6.3V X5R 0402", Manufacturer="Samsung Electro-Mechanics", TempCo=15%, Tolerance_%=20%, ValueDisplayed=22uF, AEC Qualified=No, Cap_F=22µF, ComponentLink1Description=Datasheet, ComponentLink1URL=http://www.samsungsem.com/kr/support/library/product-catalog/__icsFiles/afieldfile/2018/11/28/MLCC.pdf, PackageReference=0402, Part Number=CL05A226MQ5N6J8, PartNumber=CL05A226MQ5N6J8, RoHS=TRUE, SizeZ_mm=0.55mm, VDC_V=6.3V
C30 C56 C57 C58 C60 C61 C63 C64 C66 C67 C68 C75 C76 C80 C81 C84 C85 C87 C88 C94 C95 C96 C97 C98: library part CMP-0009781-1, "CAP, CERM, 0.22 uF, 10 V, +/- 20%, X5R, 0201", Cap_Case=0201, Manufacturer="Taiyo Yuden", Supplier Part Number 1=587-2483-1-ND, TempCo=X5R, Tolerance_%=20%, Value1=Unknown, Value2=10V, ValueDisplayed=0.22uF, AEC Category=Q200, AEC Grade=N/A, AEC Qualified=N, Cap_F=220nF, ComponentLink1Description="Datasheet link", ComponentLink1URL=http://www.yuden.co.jp/productdata/catalog/en/mlcc_all_e.pdf, CompType=Capacitor, LatestRevisionDate=2017-03-09, MountType=SMT, PackageReference=0201, PartNumber=LMK063BJ224MP-F, Polarized=N, Published=2008-06-19, Publisher="Texas Instruments", RoHS=Y, SizeArea_mm2=0.18, SizeAreaWB_mm2=2.08, SizeX_mm=0.6, SizeY_mm=0.3, SizeZ_mm=0.33, Supplier 1=Digi-Key, Supplier 2=Newark, Supplier 3=Mouser, Supplier Part Number 2=48T3327, Supplier Part Number 3=963-LMK063BJ224MP-F, TaMax_C=85°C, TaMin_C=-55°C, Technology=Ceramic, U/M=EA, VDC_V=10V
C31 C32 C33 C34: library part CMP-0086438-1, "CAP CER 390PF 25V C0G/NP0 0201", Manufacturer="Taiyo Yuden", TempCo=30ppm/°C, Tolerance_%=5%, AEC Qualified=No, Cap_F=390pF, ComponentLink1Description=Datasheet, ComponentLink1URL=https://ds.yuden.co.jp/TYCOMPAS/ut/download?pn=TMK063CG391JT-F+&fileType=CA, PackageReference="0201 (0603 Metric)", PartNumber=TMK063CG391JT-F, RoHS=TRUE, SizeZ_mm=0.33mm, Symbol Name=SYM-TMK063CG391JT-F, VDC_V=25V
C69: library part CMP-0009718-2, "CAP, CERM, 0.047 uF, 16 V, +/- 10%, X5R, 0201", Cap_Case=0201, Manufacturer=MuRata, Supplier Part Number 1=490-7227-1-ND, TempCo=X5R, Tolerance_%=10%, Value1=Unknown, Value2=16V, ValueDisplayed=0.047uF, AEC Category=Q200, AEC Grade=N/A, AEC Qualified=N, Cap_F=47nF, ComponentLink1Description="Datasheet link", ComponentLink1URL=http://search.murata.co.jp/Ceramy/image/img/A01X/G101/ENG/GRM033R61C473KE84-01.pdf, CompType=Capacitor, LatestRevisionDate=2017-03-09, MountType=SMT, PackageReference=0201, PartNumber=GRM033R61C473KE84D, Polarized=N, Published=2008-06-19, Publisher="Texas Instruments", RoHS=Y, SizeArea_mm2=0.18, SizeAreaWB_mm2=2.08, SizeX_mm=0.6, SizeY_mm=0.3, SizeZ_mm=0.33, Supplier 1=Digi-Key, Supplier 2=Mouser, Supplier Part Number 2=81-GRM033R61C473KE4D, TaMax_C=85°C, TaMin_C=-55°C, Technology=Ceramic, U/M=EA, VDC_V=16V
C74 C79 C83 C102 C103: library part CMP-0009657-3, "CAP, CERM, 2.2 uF, 6.3 V, +/- 20%, X5R, 0201", Cap_Case=0201, Manufacturer="Samsung Electro-Mechanics", TempCo=X5R, Tolerance_%=20%, Value1=Unknown, Value2=6.3V, ValueDisplayed=2.2uF, AEC Category=Q200, AEC Qualified=?, Cap_F=2.2µF, ComponentLink1Description="Datasheet link", ComponentLink1URL=http://www.samsungsem.com/servlet/FileDownload?type=spec&file=CL03A225MQ3CRNC.pdf, CompType=Capacitor, LatestRevisionDate=2017-03-09, MountType=SMT, PackageReference=0201, PartNumber=CL03A225MQ3CRNC, Polarized=N, Published=2008-06-19, Publisher="Texas Instruments", RoHS=Y, SizeArea_mm2=0.18, SizeAreaWB_mm2=2.08, SizeX_mm=0.6, SizeY_mm=0.3, SizeZ_mm=0.26, TaMax_C=85°C, TaMin_C=-55°C, Technology=Ceramic, U/M=EA, VDC_V=6.3V
C89 C90: library part CMP-0081763-1, "CAP, CERM, 1 µF, 6.3 V,+/- 10%, X6S, 0402", Cap_Case=0402, Manufacturer=TDK, Supplier Part Number 1=445-13189-1-ND, TempCo=X6S, Tolerance_%=10%, Value2=6.3V, ValueDisplayed=1µF, AEC Category=Q200, AEC Grade=N/A, AEC Qualified=N, Cap_F=1µF, ComponentLink1Description="Datasheet link", ComponentLink1URL=https://product.tdk.com/info/en/catalog/datasheets/mlcc_commercial_lowprofile_en.pdf, CompType=Capacitor, MountType=SMT, PackageReference=0402, PartNumber=CGB2A1X6S0J105K033BC, Polarized=N, RoHS=Y, SizeArea_mm2=0.5, SizeAreaWB_mm2=3, SizeX_mm=1, SizeY_mm=0.5, SizeZ_mm=0.6, Supplier 1=Digi-Key, Supplier 2=Mouser, Supplier Part Number 2=810-CGB2A1X6S0J105KC, TaMax_C=105°C, TaMin_C=-55°C, Technology=Ceramic, U/M=EA, VDC_V=6.3V
C99 C104: library part CMP-0086306-1, "CAP, CERM, 1.8 pF, 50 V,+/- 6%, C0G/NP0, 0402", Cap_Case=0402, Manufacturer=MuRata, TempCo=C0G/NP0, Tolerance_%=6%, Value2=50V, ValueDisplayed=1.8pF, AEC Category=Q200, AEC Grade=N/A, AEC Qualified=N, Cap_F=1.8pF, ComponentLink1Description="Datasheet link", ComponentLink1URL=https://search.murata.co.jp/Ceramy/image/img/A01X/G101/ENG/GJM1555C1H1R8BB01-01.pdf, CompType=Capacitor, MountType=SMT, PackageReference=0402, PartNumber=GJM1555C1H1R8BB01D, Polarized=N, RoHS=Y, SizeArea_mm2=0.5, SizeAreaWB_mm2=3, SizeX_mm=1, SizeY_mm=0.5, SizeZ_mm=0.6, TaMax_C=125°C, TaMin_C=-55°C, Technology=Ceramic, U/M=EA, VDC_V=50V
C106 C110: library part CMP-0006692-2, "CAP, CERM, 4700 pF, 50 V, +/- 10%, X7R, 0402", Cap_Case=0402, Manufacturer=MuRata, Supplier Part Number 1=490-1308-1-ND, TempCo=X7R, Tolerance_%=10%, Value1=Unknown, Value2=50V, ValueDisplayed=4700pF, AEC Category=Q200, AEC Qualified=?, Cap_F=4.7nF, ComponentLink1Description="Datasheet link", ComponentLink1URL=http://search.murata.co.jp/Ceramy/PnsearchViewAction.do?HnOFG=ON&HnNFG=ON&SEL_CNT=50&sLang=en&sKey=GRM155R71H472KA01D&x=9&y=9&search=startwith, CompType=Capacitor, LatestRevisionDate=2017-03-09, MountType=SMT, PackageReference=0402, PartNumber=GRM155R71H472KA01D, Polarized=N, Published=2008-06-19, Publisher="Texas Instruments", RoHS=Y, SizeArea_mm2=0.5, SizeAreaWB_mm2=3, SizeX_mm=1, SizeY_mm=0.5, SizeZ_mm=0.6, Supplier 1=Digi-Key, Supplier 2=Newark, Supplier 3=Mouser, Supplier Part Number 2=14T3289, Supplier Part Number 3=81-GRM155R71H472KA01, TaMax_C=125°C, TaMin_C=-55°C, Technology=Ceramic, U/M=EA, VDC_V=50V
D1 D2: library part CMP-0028829-2, "Diode, Schottky, 30 V, 2 A, 2-XFDFN", Manufacturer="ON Semiconductor", Value1=2A, Value2=0.48V, AEC Category=Q101, AEC Qualified=N, ComponentLink1Description="Datasheet link", ComponentLink1URL=http://www.onsemi.com/pub_link/Collateral/NSR20F30-D.PDF, CompType=Diode, Green_EU RoHS=Incomplete, Green_EU RoHS-2=Incomplete, Green_Lifecycle="Not Set", Green_REACh=Incomplete, Io_A=2A, MountType=SMT, PackageReference=2-XFDFN, PartNumber=NSR20F30NXT5G, RoHS=Y, SizeArea_mm2=1.28, SizeAreaWB_mm2=4.68, SizeX_mm=1.6, SizeY_mm=0.8, SizeZ_mm=0.31, TJmax_C=150°C, Type=Schottky, Vf_V=480mV, Vr_V=30V
FID1 FID2 FID3 FID4 FID5 FID6: library part CMP-0077181-1, "Fiducial mark.  There is nothing to buy or mount.", Manufacturer=N/A, ClassName=FiducialMark, CompType=Fiducial, MountType=N/A, PackageReference=N/A, PartNumber=N/A
FL1 FL2 FL3 FL6 FL7 FL8 FL9 FL10 FL11 FL12 FL14 FL20 FL22: library part CMP-0078934-1, "Inductor, Ferrite Bead, Ferrite, 2.2 A, 0.035 ohm, AEC-Q200 Grade 1, SMD", Manufacturer=MuRata, Supplier Part Number 1=490-16506-1-ND, Value1="0.035 ohm", Value2=2.2A, AEC Category=Q200, AEC Grade=1, AEC Qualified=Y, ComponentLink1Description="Datasheet link", ComponentLink1URL=https://www.murata.com/en-us/products/productdata/8796748677150/QNFA9118.pdf, CompType=Inductor, DCR_ohm=0.035, Imax_A=2.2A, LatestRevisionDate=2017-12-07, Material=Ferrite, MountType=SMT, PackageReference=0402, PartNumber=BLM15PD300SZ1D, Published=2008-06-26, Publisher="Texas Instruments", RoHS=Y, SizeArea_mm2=0.5, SizeAreaWB_mm2=3, SizeX_mm=1, SizeY_mm=0.5, SizeZ_mm=0.6, Supplier 1=Digi-Key, Supplier 2=Mouser, Supplier Part Number 2=81-BLM15PD300SZ1D, Technology="Ferrite Bead"
J1 J5: library part CMP-0055293-1, "Connector, Receptacle, Micro-USB Type B, R/A, Bottom Mount SMT", Manufacturer=Molex, Supplier Part Number 1=WM1399CT-ND, CNHeader=FALSE, ComponentLink1Description="Datasheet URL", ComponentLink1URL=http://www.molex.com/pdm_docs/sd/1050170001_sd.pdf, CompType=USB, CT=TRUE, Gender=Female, Green_EU RoHS=Passed, Green_EU RoHS-2=Passed, Green_Lifecycle=Active, Green_REACh=Passed, LatestRevisionDate=26/05/2017, MountType=SMT, PackageReference="Micro USB receptacle", PartNumber=105017-0001, Publisher="Texas Instruments", RoHS=Y, Supplier 1=Digi-Key, Supplier 2=Newark, Supplier 3=Mouser, Supplier Part Number 2=78R1699, Supplier Part Number 3=538-105017-0001
J2: library part CMP-0075524-1, "Receptacle, 0.5 mm, 30x2, Gold, TH", Color=Black, Manufacturer=Samtec, Supplier Part Number 1=SAM8180-ND, CNHeader=False, ComponentLink1Description="Datasheet URL", ComponentLink1URL=http://www.samtec.com/ftppub/cpdf/QSH-XXX-01-X-D-XX-MKT.pdf, CompType=Receptacle, ContactFinish=Gold, CT=False, Gender=Female, Green_EU RoHS="Passed with Exemption", Green_EU RoHS-2=Passed, Green_Lifecycle=Active, Green_REACh=Passed, LatestRevisionDate=2017-07-12, MountType=SMT, Orientation=Vertical, PackageReference="Receptacle, 0.5 mm, 30x2, TH", PartNumber=QSH-030-01-L-D-A, PinCount=60, Pitch_mm=0.5, Publisher="Texas Instruments", RoHS=Y, Row_Count=2, RowSpacing_mm=5.73, Shrouded=N, Supplier 1=Digi-Key, Supplier 2=Newark, Supplier 3=Farnell, Supplier Part Number 2=19M9181, Supplier Part Number 3=1667876
J3: library part CMP-0087187-1, "CONN HDR 1.27MM R/A AU 4POS", Current_A=1A, Manufacturer="Harwin Inc.", ComponentLink1Description=Datasheet, ComponentLink1URL=https://cdn.harwin.com/pdfs/M50-393.pdf, ContactFinish=Gold, PackageReference=HDR4, PartNumber=M50-3930442, PinCount=4, RoHS=TRUE, Row_Count=1, Symbol Name=SYM-M50-3930442
J4 J6: library part CMP-0086453-1, "Easy-On™ Type FFC/FPC Connector, Right-Angle, Surface Mount, ZIF, Bottom Contact Style, 1.10mm Mated Height, 10 Circuits", Manufacturer=Molex, ComponentLink1Description=Datasheet, ComponentLink1URL=http://www.molex.com/pdm_docs/sd/514411093_sd.pdf, PackageReference=CONN_SMD_FFC, PartNumber=51441-1093, RoHS=TRUE, Symbol Name=SYM-51441-1093
J7: library part CMP-0087786-1, "CONN HEADER R/A 10POS 1.27MM", Current_A=1A, Manufacturer=Sullins, ComponentLink1Description=Datasheet, ComponentLink1URL=https://s3.amazonaws.com/catalogspreads-pdf/PAGE94-95%20.050%20MALE%20HDR%20ST%20RA%20SMT.pdf, ContactFinish=Gold, PackageReference=HDR10, PartId=1, PartNumber=GRPB052MWCN-RC, PinCount=10, RoHS=TRUE, Row_Count=2, Symbol Name=SYM-GRPB052MWCN-RC
J8 J10: library part CMP-0087785-1, "CONN HEADER R/A 3POS 1.27MM", Current_A=1A, Manufacturer=Harwin, ComponentLink1Description=Datasheet, ComponentLink1URL=https://cdn.harwin.com/pdfs/M50-393.pdf, ContactFinish=Gold,Nickel, PackageReference=HDR3, PartNumber=M50-3930342, PinCount=3, RoHS=TRUE, Row_Count=1, Symbol Name=SYM-M50-3930342
J9: library part CMP-0075320-1, "Receptacle, Ultra Miniature Coaxial, Male Pin, 50 ohm, SMT", Color=Beige, Manufacturer="Hirose Electric Co. Ltd.", Supplier Part Number 1=H122041-ND, CNHeader=False, ComponentLink1Description="Datasheet URL", ComponentLink1URL=https://www.hirose.com/product/en/download_file/key_name/U.FL%2DR%2DSMT%2D1%2801%29/category/Drawing%20(2D)/doc_file_id/37625/?file_category_id=6&item_id=03310472201&is_series=, CompType=Receptacle, ContactFinish=Gold, CT=False, Gender=Female, LatestRevisionDate=2017-07-12, MountType=SMT, Orientation=Vertical, PackageReference="Ultra small CO-AX SMD", PartNumber=U.FL-R-SMT-1(01), PinCount=3, Publisher="Texas Instruments", RoHS=Y, Supplier 1=Digi-Key, Supplier 2=Newark, Supplier 3=Mouser, Supplier Part Number 2=18K7517, Supplier Part Number 3=798-U.FL-R-SMT01
L1 L6: library part CMP-0058626-1, "Inductor, Multilayer, Air Core, 2.4 nH, 0.3 A, 0.15 ohm, SMD", Manufacturer=MuRata, Supplier Part Number 1=LQG15HS2N4S02D-ND, Value1="0.15 ohm", Value2=0.3A, ValueDisplayed=2.4nH, AEC Category=Q200, AEC Qualified=?, ComponentLink1Description="Datasheet link", ComponentLink1URL=http://search.murata.co.jp/Ceramy/image/img/PDF/ENG/L0075S0083LQG15HS.pdf, CompType=Inductor, DCR_ohm=0.15, Green_EU RoHS=Passed, Green_EU RoHS-2=Incomplete, Green_Lifecycle=Active, Green_REACh=Passed, Imax_A=300mA, Ind_H=2.4nH, Irms="0.3A @ C rise", Isat="0.3A @ % inductance drop", LatestRevisionDate=2017-06-02, Material="Air Core", MountType=SMT, PackageReference="0402 polarized", PartNumber=LQG15HS2N4S02D, Published=2008-06-26, Publisher="Texas Instruments", RoHS=Y, SizeArea_mm2=0.5, SizeAreaWB_mm2=3, SizeX_mm=1, SizeY_mm=0.5, SizeZ_mm=0.55, Supplier 1=Digi-Key, Supplier 2=Mouser, Supplier Part Number 2=81-LQG15HS2N4S02D, Technology=Multilayer
L2 L3 L4 L5: library part CMP-0087178-1, "FIXED IND 470NH 4.5A 39 MOHM SMD", Manufacturer="Taiyo Yuden", AEC Qualified=No, ComponentLink1Description=Datasheet, ComponentLink1URL=https://ds.yuden.co.jp/TYCOMPAS/ut/download?pn=MCKK2012TR47M&fileType=CS, DCR_ohm=0.032, Ind_H=470nH, Irms=3.1A, Isat=4.5A, Material=Metal, PackageReference="0805 (2012 Metric)", PartNumber=MCKK2012TR47M, RoHS=TRUE, SizeZ_mm=1mm, Symbol Name=SYM-MCKK2012TR47M, Technology=Multilayer
L7: library part CMP-0062727-1, "Inductor, Multilayer, Ferrite, 6.8 uH, 0.11 A, 0.25 ohm, SMD", Manufacturer=TDK, Supplier Part Number 1=445-6761-1-ND, Value1="0.25 ohm", Value2=0.11A, ValueDisplayed=6.8uH, AEC Category=Q200, AEC Qualified=?, ComponentLink1Description="Datasheet link", ComponentLink1URL=http://product.tdk.com/en/catalog/datasheets/inductor_commercial_decoupling_mlz_en.pdf, CompType=Inductor, DCR_ohm=0.25, Green_EU RoHS=Passed, Green_EU RoHS-2=Incomplete, Green_Lifecycle=Active, Green_REACh=Passed, Imax_A=110mA, Ind_H=6.8µH, Irms="0.55A @ 20C rise", Isat="0.11A @ 50% inductance drop", LatestRevisionDate=2017-06-02, Material=Ferrite, MountType=SMT, PackageReference=0805, PartNumber=MLZ2012N6R8LT000, Published=2008-06-26, Publisher="Texas Instruments", RoHS=Y, SizeArea_mm2=2.5, SizeAreaWB_mm2=6.75, SizeX_mm=2, SizeY_mm=1.25, SizeZ_mm=1.45, Supplier 1=Digi-Key, Technology=Multilayer
L8: library part CMP-0003349-2, "Ferrite Bead, 1500 ohm @ 100 MHz, 0.5 A, 0603", Manufacturer=MuRata, Supplier Part Number 1=490-5216-1-ND, Value1="0.5 ohm", Value2=0.5A, ValueDisplayed="1500 ohm", ComponentLink1Description="Datasheet link", ComponentLink1URL=http://search.murata.co.jp/Ceramy/image/img/PDF/ENG/L0110S0101BLM18H.pdf, CompType="Ferrite Bead", DCR_ohm=0.5, Imax_A=500mA, LatestRevisionDate=2017-03-09, MountType=SMT, PackageReference=0603, PartNumber=BLM18HE152SN1D, Published=2014-04-30, Publisher="Texas Instruments", RoHS=Y, SizeArea_mm2=1.28, SizeAreaWB_mm2=4.68, SizeX_mm=1.6, SizeY_mm=0.8, SizeZ_mm=1, Supplier 1=Digi-Key, Supplier 2=Newark, Supplier 3=Mouser, Supplier Part Number 2=87X8574, Supplier Part Number 3=81-BLM18HE152SN1D, Ztyp@1GHz_Ohm=1.5k, ZTyp@100MHz_Ohm=1.5k
L9 L10: library part CMP-0058624-1, "Inductor, Multilayer, Air Core, 2 nH, 0.3 A, 0.1 ohm, SMD", Manufacturer=MuRata, Supplier Part Number 1=490-6569-1-ND, Value1="0.1 ohm", Value2=0.3A, ValueDisplayed=2nH, AEC Category=Q200, AEC Qualified=?, ComponentLink1Description="Datasheet link", ComponentLink1URL=http://search.murata.co.jp/Ceramy/image/img/PDF/ENG/L0075S0083LQG15HS.pdf, CompType=Inductor, DCR_ohm=0.1, Green_EU RoHS=Passed, Green_EU RoHS-2=Incomplete, Green_Lifecycle=Active, Green_REACh=Passed, Imax_A=300mA, Ind_H=2nH, Irms="0.3A @ C rise", Isat="0.3A @ % inductance drop", LatestRevisionDate=2017-06-02, Material="Air Core", MountType=SMT, PackageReference="0402 polarized", PartNumber=LQG15HS2N0S02D, Published=2008-06-26, Publisher="Texas Instruments", RoHS=Y, SizeArea_mm2=0.5, SizeAreaWB_mm2=3, SizeX_mm=1, SizeY_mm=0.5, SizeZ_mm=0.55, Supplier 1=Digi-Key, Supplier 2=Mouser, Supplier Part Number 2=81-LQG15HS2N0S02D, Technology=Multilayer
L11 L12 L13 L14: library part CMP-0003354-2, "Ferrite Bead, 26 ohm @ 100 MHz, 6 A, 0603", Manufacturer=MuRata, Supplier Part Number 1=490-3995-1-ND, Value1="0.007 ohm", Value2=6A, ValueDisplayed="26 ohm", ComponentLink1Description="Datasheet link", ComponentLink1URL=http://search.murata.co.jp/Ceramy/image/img/PDF/ENG/L0110S0100BLM18S.pdf, CompType="Ferrite Bead", DCR_ohm=7m, Imax_A=6A, LatestRevisionDate=2017-03-09, MountType=SMT, PackageReference=0603, PartNumber=BLM18SG260TN1D, Published=2014-04-30, Publisher="Texas Instruments", RoHS=Y, SizeArea_mm2=1.28, SizeAreaWB_mm2=4.68, SizeX_mm=1.6, SizeY_mm=0.8, SizeZ_mm=1, Supplier 1=Digi-Key, Supplier 2=Newark, Supplier 3=Mouser, Supplier Part Number 2=73M9124, Supplier Part Number 3=81-BLM18SG260TN1D, ZTyp@100MHz_Ohm=26
LD1 LD2 LD3 LD4 LD5 LD6: library part CMP-0067682-2, "LED, Green, SMD", Color=Green, Manufacturer=Kingbright, Power_TotalModule=75mW, Value1=0.075W, Value2=2.1V, Angle=120.0, ComponentLink1Description="Datasheet link", ComponentLink1URL=http://www.kingbrightusa.com/images/catalog/SPEC/APHHS1005CGCK.pdf, CompType=LED, Io_A=20mA, Ir_A=10µA, MountType=SMT, PackageReference=0402, PartNumber=APHHS1005CGCK, RoHS=Y, SizeArea_mm2=0.5, SizeAreaWB_mm2=3.0, SizeX_mm=1.0, SizeY_mm=0.5, SizeZ_mm=0.6, TJmax_C=85°C, Type=?, Vf_V=2.1V, Vr_V=5V
Q1: library part CMP-0087176-1, "MOSFET N-CH 100V 170MA SOT23-3", Manufacturer="Diodes Incorporated", AEC Qualified=No, ChMode=False, ComponentLink1Description=Datasheet, ComponentLink1URL=https://www.diodes.com/assets/Datasheets/ds30366.pdf, IdsMax_A=170mA, PackageReference=SOT23, PartNumber=BSS123-7-F, Rdson45_ohm=6, RoHS=TRUE, SizeZ_mm=1.1mm, Symbol Name=SYM-BSS123-7-F, VdsMax_V=100V, Vgs_V=20V
R1 R3 R7 R8 R18 R19 R20 R21 R22 R23 R35 R36 R43 R44 R45 R59 R65 R77 R78 R80 R81 R82 R83 R84 R85 R93 R94 R95 R96 R98 R104 R110 R118 R122 R124 R125 R134 R177 R178: library part CMP-0088002-1, "10 kOhms ±0.5% 0.05W, 1/20W Chip Resistor 0201 (0603 Metric)  Thin Film", Manufacturer=Susumu, Power_W=50mW, TempCo=25ppm/°C, Tolerance_%=0.5%, AEC Qualified=No, ComponentLink1Description=Datasheet, ComponentLink1URL=https://www.susumu.co.jp/common/pdf/n_catalog_partition05_en.pdf, PackageReference=0201, PartNumber=RR0306P-103-D, Res_ohm=10k, RoHS=TRUE, SizeZ_mm=0.26mm, Symbol Name=SYM-RR0306P-103-D, Technology="Thin Film", VDC_V=15V
R2 R12 R14 R28 R30 R31 R32 R41 R51 R57 R58 R60 R61 R62 R63 R66 R67 R68 R70 R71 R72 R73 R74 R76 R86 R87 R90 R91 R97 R99 R100 R101 R102 R103 R105 R106 R109 R112 R113 R115 R116 R120 R121 R123 R127 R128 R129 R131 R136 R139 R160 R161 R166 R168 R182 R183 R184 R185: library part CMP-0086442-2, "RES SMD 0 OHM JUMPER 1/20W 0201", Manufacturer=Yageo, Power_W=50mW, TempCo=200ppm/°C, Tolerance_%=5%, AEC Qualified=No, ComponentLink1Description=Datasheet, ComponentLink1URL=http://www.yageo.com/documents/recent/PYu-RC_Group_51_RoHS_L_10.pdf, PackageReference="0201 (0603 Metric)", PartNumber=RC0201JR-070RL, Res_ohm=0, RoHS=TRUE, SizeZ_mm=0.26mm, Technology="Thick Film", VDC_V=25V